# EAGLE board pure_midi (EAGLE 9.4.2)
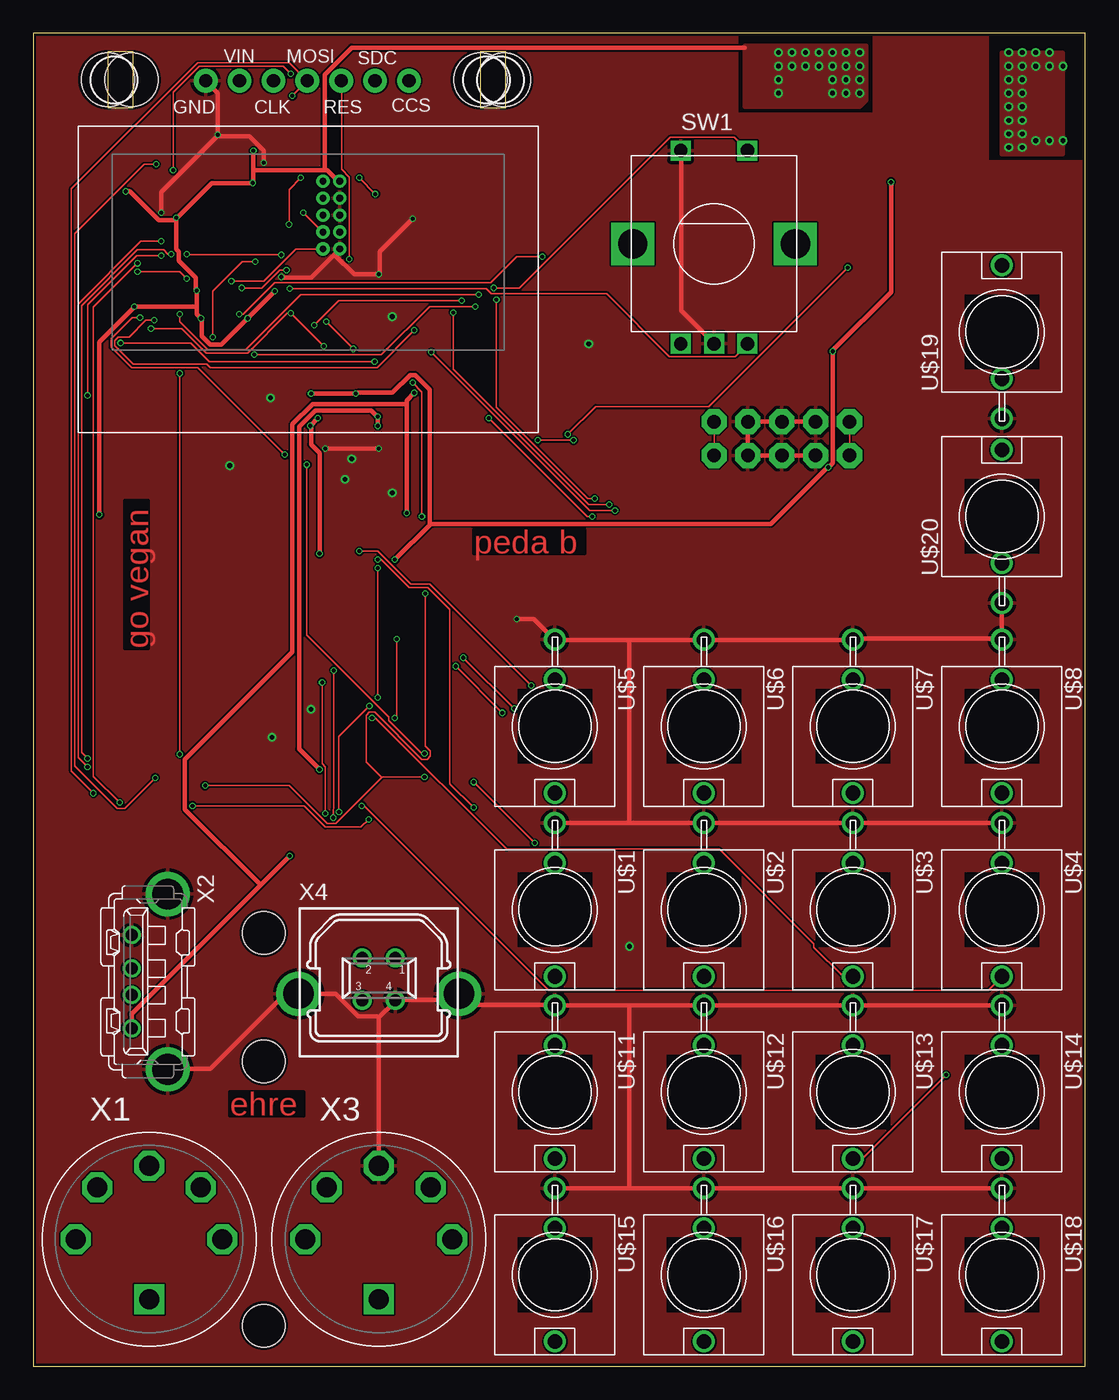
[diagram p0: board, top side]
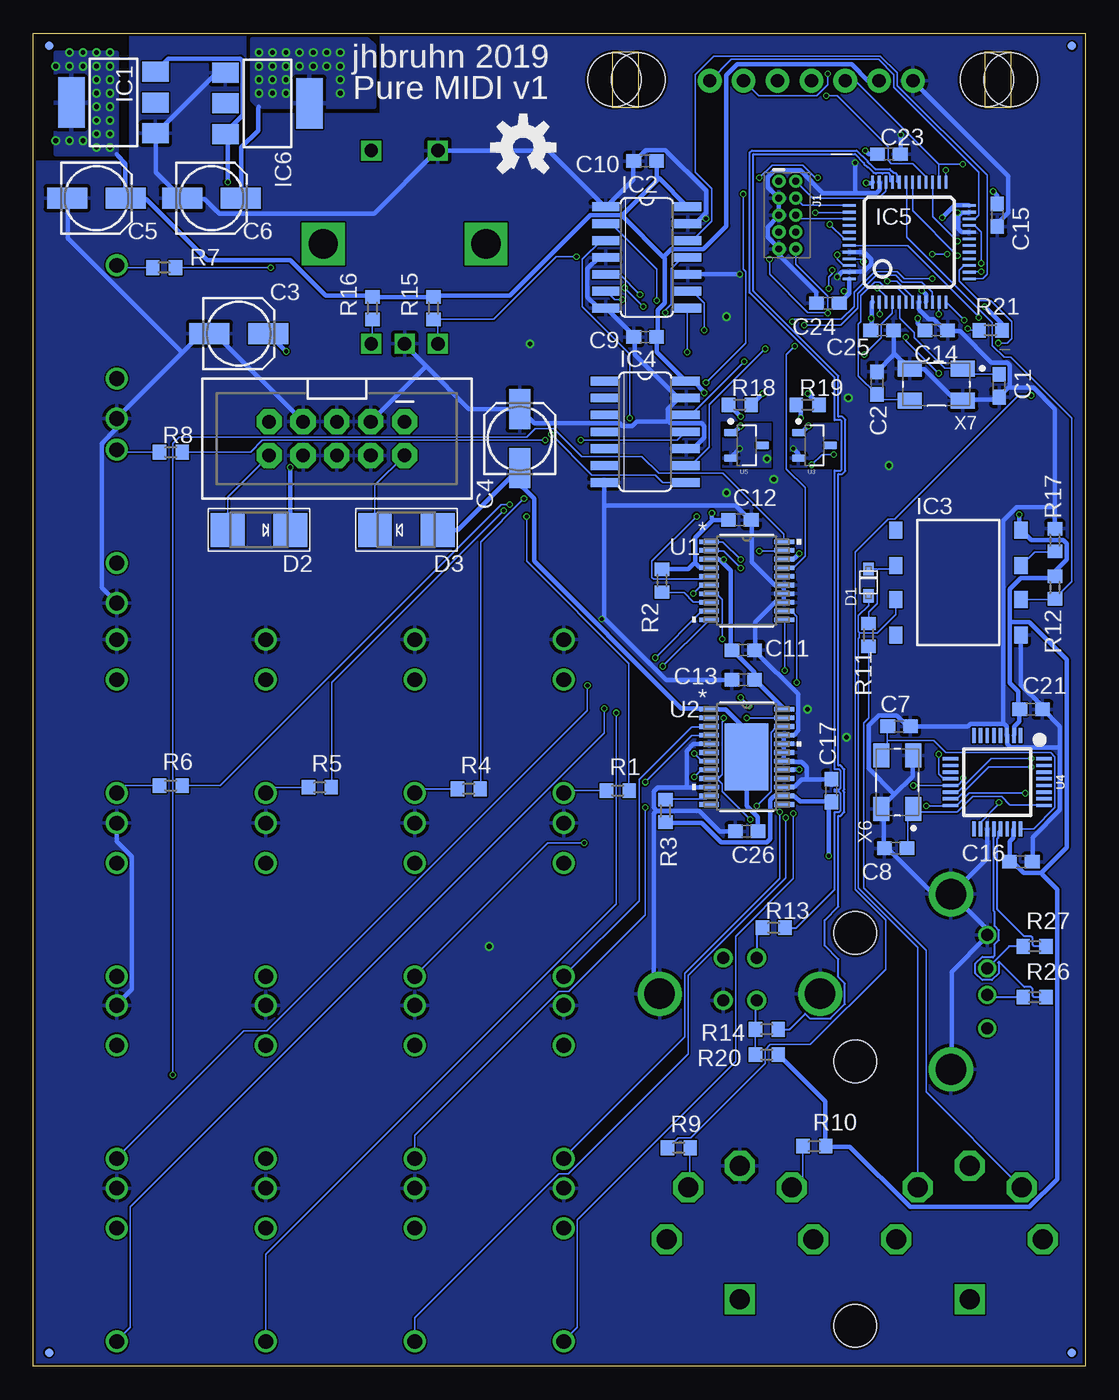
[diagram p1: board, bottom side, seen from below]

Size 78.9 x 100 mm. Coordinates in mm from the lower left corner, seen from the top.
Outline: 0,0 78.9,0 78.9,100 0,100 0,0
Copper layers (1*16): Top 0.035559375mm / dielectric 1.6mm / Bottom 0.035559375mm
Design rules "jlcpcb2layer": minimum track width 5mil, minimum drill 12mil, track to track 5mil, track to pad 5mil, pad to pad 5mil, via to via 5mil, smd to smd 5mil, copper to edge 8mil, drill to drill 6mil, minimum pad ring 5mil, minimum via ring 3mil, stop-mask expansion 2.5mil, vias tented up to drill 0mil, thermal gap 10mil
Net classes: 1 POWER: width 0.356 mm
Holes 3.2 mm at 17.27,22.86 17.27,3.05 17.27,32.51

## Footprints (pad centres in the part's own frame; a part is rotated, then mirrored left to right if it is on the bottom)
C0603 = smd 1.1 x 1: 1 -0.85,0; 2 0.85,0
153CLV-0505 = smd 3 x 1.6: + 2.2,0; - -2.2,0
SOD-323F = smd 1 x 0.8: A -1,0; C 1,0
SMADIODE = smd 2.54 x 2.54: A 2.349,0; C -2.349,0
C1_ADAFRUIT_1.3_128X64_OLED = drill 1 pad 1.778: CCS 25.12,32.43; CLK 14.96,32.43; GND 9.88,32.43; MOSI 17.5,32.43; RES 20.04,32.43; SDC 22.58,32.43; VIN 12.42,32.43 | hole 4: 2.54,32.512; 4.318,32.512; 30.48,32.512; 32.258,32.512
FIDUCIAL-MICRO = smd 0.635 x 0.635: 1 0,0
SOT223 = smd 1.5 x 2: 1 -2.3,-3.15; 2 0,-3.15; 3 2.3,-3.15 | smd 3.8 x 2: 4 0,3.15
SO14 = smd 0.66 x 2.032: 1 -3.81,-3.073; 2 -2.54,-3.073; 3 -1.27,-3.073; 4 0,-3.073; 5 1.27,-3.073; 6 2.54,-3.073; 7 3.81,-3.073; 8 3.81,3.073; 9 2.54,3.073; 10 1.27,3.073; 11 0,3.073; 12 -1.27,3.073; 13 -2.54,3.073; 14 -3.81,3.073
SO8-GW300 = smd 1 x 1.27: 1 -4.69,3.937; 2 -4.69,1.27; 3 -4.69,-1.27; 4 -4.69,-3.937; 5 4.69,-3.937; 6 4.69,-1.27; 7 4.69,1.27; 8 4.69,3.937
TQFP48 = smd 0.2 x 1: 1 -2.75,-4.5; 2 -2.25,-4.5; 3 -1.75,-4.5; 4 -1.25,-4.5; 5 -0.75,-4.5; 6 -0.25,-4.5; 7 0.25,-4.5; 8 0.75,-4.5; 9 1.25,-4.5; 10 1.75,-4.5; 11 2.25,-4.5; 12 2.75,-4.5; 25 2.75,4.5; 26 2.25,4.5; 27 1.75,4.5; 28 1.25,4.5; 29 0.75,4.5; 30 0.25,4.5; 31 -0.25,4.5; 32 -0.75,4.5; 33 -1.25,4.5; 34 -1.75,4.5; 35 -2.25,4.5; 36 -2.75,4.5 | smd 1 x 0.2: 13 4.5,-2.75; 14 4.5,-2.25; 15 4.5,-1.75; 16 4.5,-1.25; 17 4.5,-0.75; 18 4.5,-0.25; 19 4.5,0.25; 20 4.5,0.75; 21 4.5,1.25; 22 4.5,1.75; 23 4.5,2.25; 24 4.5,2.75; 37 -4.5,2.75; 38 -4.5,2.25; 39 -4.5,1.75; 40 -4.5,1.25; 41 -4.5,0.75; 42 -4.5,0.25; 43 -4.5,-0.25; 44 -4.5,-0.75; 45 -4.5,-1.25; 46 -4.5,-1.75; 47 -4.5,-2.25; 48 -4.5,-2.75
2X5-PTH-1.27MM = drill 0.508 pad 1: 1 -2.54,-0.635; 2 -2.54,0.635; 3 -1.27,-0.635; 4 -1.27,0.635; 5 0,-0.635; 6 0,0.635; 7 1.27,-0.635; 8 1.27,0.635; 9 2.54,-0.635; 10 2.54,0.635
2X5-SHROUDED = drill 1.016 pad 1.88 octagon: 1 -1.27,5.08; 2 1.27,5.08; 3 -1.27,2.54; 4 1.27,2.54; 5 -1.27,0; 6 1.27,0; 7 -1.27,-2.54; 8 1.27,-2.54; 9 -1.27,-5.08; 10 1.27,-5.08
R0603 = smd 1 x 1.1: 1 -0.85,0; 2 0.85,0
ALPS_EC12E_SW = drill 1 square: A -2.5,-7.5; B 2.5,-7.5; C 0,-7.5; D -2.5,7; E 2.5,7 | drill 2.2 square: GND1 -6.1,0; GND2 6.1,0
RU_20 = smd 1.473 x 0.356: 1 -2.819,2.925; 2 -2.819,2.275; 3 -2.819,1.625; 4 -2.819,0.975; 5 -2.819,0.325; 6 -2.819,-0.325; 7 -2.819,-0.975; 8 -2.819,-1.625; 9 -2.819,-2.275; 10 -2.819,-2.925; 11 2.819,-2.925; 12 2.819,-2.275; 13 2.819,-1.625; 14 2.819,-0.975; 15 2.819,-0.325; 16 2.819,0.325; 17 2.819,0.975; 18 2.819,1.625; 19 2.819,2.275; 20 2.819,2.925
RE_24 = smd 1.473 x 0.356: 1 -2.819,3.575; 2 -2.819,2.925; 3 -2.819,2.275; 4 -2.819,1.625; 5 -2.819,0.975; 6 -2.819,0.325; 7 -2.819,-0.325; 8 -2.819,-0.975; 9 -2.819,-1.625; 10 -2.819,-2.275; 11 -2.819,-2.925; 12 -2.819,-3.575; 13 2.819,-3.575; 14 2.819,-2.925; 15 2.819,-2.275; 16 2.819,-1.625; 17 2.819,-0.975; 18 2.819,-0.325; 19 2.819,0.325; 20 2.819,0.975; 21 2.819,1.625; 22 2.819,2.275; 23 2.819,2.925; 24 2.819,3.575 | smd 3.251 x 5.029: 25 0,0
TEXAS_INSTRUMENTS_LM4040C5IDBZR_1 = smd 1 x 0.6: 1 -1.2,0.95; 2 -1.2,-0.95; 3 1.2,0
TQFP32-5MM = smd 1.143 x 0.254: 1 -3.5,1.75; 2 -3.5,1.25; 3 -3.5,0.75; 4 -3.5,0.25; 5 -3.5,-0.25; 6 -3.5,-0.75; 7 -3.5,-1.25; 8 -3.5,-1.75; 17 3.5,-1.75; 18 3.5,-1.25; 19 3.5,-0.75; 20 3.5,-0.25; 21 3.5,0.25; 22 3.5,0.75; 23 3.5,1.25; 24 3.5,1.75 | smd 0.254 x 1.143: 9 -1.75,-3.5; 10 -1.25,-3.5; 11 -0.75,-3.5; 12 -0.25,-3.5; 13 0.25,-3.5; 14 0.75,-3.5; 15 1.25,-3.5; 16 1.75,-3.5; 25 1.75,3.5; 26 1.25,3.5; 27 0.75,3.5; 28 0.25,3.5; 29 -0.25,3.5; 30 -0.75,3.5; 31 -1.25,3.5; 32 -1.75,3.5
TEXAS_INSTRUMENTS_LM4040C25IDBZR_1 = smd 1 x 0.6: 1 -1.2,0.95; 2 -1.2,-0.95; 3 1.2,0
WQP-PJ301M-12_JACK = drill 1.1: P$1 0,5; P$2 0,-3.5; P$3 0,-6.5
OG-MIDI_SD-50BV = drill 1.5 octagon: 1 -5.5,0; 2 0,5.5; 3 5.5,0; 4 -3.89,3.89; 5 3.89,3.89 | drill 1.5 square: P$3 0,-4.5
KUSBVX = drill 0.9 pad 1.3: 1 3.5,0; 2 1,0; 3 -1,0; 4 -3.5,0 | drill 2.3 pad 2.8: M1 -6.57,2.71; M2 6.57,2.71
KUSBVX-BS1N = drill 0.9 pad 1.422: 1 1.25,2.7; 2 -1.25,2.7; 3 -1.25,-0.5; 4 1.25,-0.5 | drill 2.3 pad 2.7: M1 -6.02,0; M2 6.02,0
ABRACON_ABM3B-12.000MHZ-B2-T_0 = smd 1.8 x 1.2: 1 -2,-1.2; 2 2,-1.2; 3 2,1.2; 4 -2,1.2
ABRACON_ABM3B-8.000MHZ-B2-T_0 = smd 1.8 x 1.2: 1 -2,-1.2; 2 2,-1.2; 3 2,1.2; 4 -2,1.2

## Placement (x,y rotation side)
C1  22p  [C0603]  6.46,73.56 90 bottom
C2  22p  [C0603]  15.63,73.76 270 bottom
C3  22u  [153CLV-0505]  63.5,77.47 0 bottom
C4  22u  [153CLV-0505]  42.42,69.6 90 bottom
C5  22u  [153CLV-0505]  74.17,87.63 0 bottom
C6  22u  [153CLV-0505]  65.53,87.63 0 bottom
C7  22p  [C0603]  13.97,48.01 180 bottom
C8  22p  [C0603]  14.22,38.86 0 bottom
C9  100n  [C0603]  33.02,77.22 180 bottom
C10  100n  [C0603]  33.02,90.42 180 bottom
C11  100n  [C0603]  25.65,53.72 0 bottom
C12  100n  [C0603]  25.91,63.5 0 bottom
C13  100n  [C0603]  25.65,51.5 180 bottom
C14  100n  [C0603]  11.18,77.72 0 bottom
C15  100n  [C0603]  6.6,86.36 270 bottom
C16  100n  [C0603]  4.83,37.85 0 bottom
C17  100n  [C0603]  19.05,43.18 90 bottom
C21  100n  [C0603]  4.06,49.28 0 bottom
C23  100n  [C0603]  14.73,90.93 0 bottom
C24  100n  [C0603]  19.3,79.76 180 bottom
C25  100n  [C0603]  15.24,77.72 0 bottom
C26  100n  [C0603]  25.4,40.13 0 bottom
D1  1N4148  [SOD-323F]  16.26,58.8 90 bottom
D2  1N4001  [SMADIODE]  61.98,62.74 180 bottom
D3  1N4001  [SMADIODE]  50.93,62.74 0 bottom
DI1  OLED_1.3_128X64_SPI  [C1_ADAFRUIT_1.3_128X64_OLED]  3.05,64.01 0 top
FD1  FIDUCIALUFIDUCIAL  [FIDUCIAL-MICRO]  1.02,1.02 0 bottom
FD2  FIDUCIALUFIDUCIAL  [FIDUCIAL-MICRO]  77.72,1.02 0 bottom
FD3  FIDUCIALUFIDUCIAL  [FIDUCIAL-MICRO]  1.02,99.06 0 bottom
FD4  FIDUCIALUFIDUCIAL  [FIDUCIAL-MICRO]  77.72,99.06 0 bottom
IC1  LD117AS50TR  [SOT223]  72.9,94.81 90 bottom
IC2  74HCT125D  [SO14]  32.89,83.19 270 bottom
IC3  6N138SMD  [SO8-GW300]  9.53,58.8 0 bottom
IC4  74HCT125D  [SO14]  33.02,70.1 270 bottom
IC5  STM32F10XCXT6  [TQFP48]  13.21,84.33 0 bottom
IC6  LD117AS33TR  [SOT223]  61.34,94.74 270 bottom
J1  CORTEX_DEBUG_PTH  [2X5-PTH-1.27MM]  22.35,86.36 270 bottom
LOGO1  OSHW-LOGOM  [OSHW-LOGO-M]  42.16,91.44 0 bottom
PWR1  HEADER2X5SHD  [2X5-SHROUDED]  56.13,69.6 270 bottom
R1  1k  [R0603]  35.05,43.18 0 bottom
R2  4k7  [R0603]  31.75,58.93 90 bottom
R3  4k7  [R0603]  31.5,41.66 270 bottom
R4  1k  [R0603]  46.23,43.31 0 bottom
R5  1k  [R0603]  57.4,43.43 0 bottom
R6  1k  [R0603]  68.58,43.56 0 bottom
R7  1k  [R0603]  69.09,82.42 0 bottom
R8  1k  [R0603]  68.58,68.58 0 bottom
R9  51R  [R0603]  30.48,16.38 0 bottom
R10  51R  [R0603]  20.32,16.51 0 bottom
R11  220R  [R0603]  16.26,54.86 90 bottom
R12  470R  [R0603]  2.29,58.42 90 bottom
R13  22R  [R0603]  23.37,32.89 0 bottom
R14  22R  [R0603]  23.88,25.27 0 bottom
R15  10k  [R0603]  48.9,79.38 90 bottom
R16  10k  [R0603]  53.47,79.38 90 bottom
R17  1k  [R0603]  2.29,61.98 270 bottom
R18  2k  [R0603]  25.91,72.14 0 bottom
R19  2k  [R0603]  20.83,72.14 0 bottom
R20  1k5  [R0603]  23.88,23.37 180 bottom
R21  10k  [R0603]  7.11,77.72 0 bottom
R26  33R  [R0603]  3.81,27.69 0 bottom
R27  33R  [R0603]  3.81,31.5 0 bottom
SW1  EC12E_SW  [ALPS_EC12E_SW]  51.05,84.2 0 top
U1  AD5676ARUZ  [RU_20]  25.4,58.93 0 bottom
U2  AD5754BREZ  [RE_24]  25.4,45.72 0 bottom
U3  TEXAS_INSTRUMENTS_LM4040C5IDBZR1  [TEXAS_INSTRUMENTS_LM4040C5IDBZR_1]  20.32,69.09 0 bottom
U4  MAX3421  [TQFP32-5MM]  6.6,43.81 270 bottom
U5  TEXAS_INSTRUMENTS_LM4040C25IDBZRTEXAS_INSTRUMENTS_LM4040C25IDBZR_0_1  [TEXAS_INSTRUMENTS_LM4040C25IDBZR_1]  25.4,69.09 0 bottom
U$1  WQP-PJ301M-12_JACK  [WQP-PJ301M-12_JACK]  39.12,34.24 180 top
U$2  WQP-PJ301M-12_JACK  [WQP-PJ301M-12_JACK]  50.29,34.24 180 top
U$3  WQP-PJ301M-12_JACK  [WQP-PJ301M-12_JACK]  61.47,34.24 180 top
U$4  WQP-PJ301M-12_JACK  [WQP-PJ301M-12_JACK]  72.64,34.24 180 top
U$5  WQP-PJ301M-12_JACK  [WQP-PJ301M-12_JACK]  39.12,48.01 180 top
U$6  WQP-PJ301M-12_JACK  [WQP-PJ301M-12_JACK]  50.29,48.01 180 top
U$7  WQP-PJ301M-12_JACK  [WQP-PJ301M-12_JACK]  61.47,48.01 180 top
U$8  WQP-PJ301M-12_JACK  [WQP-PJ301M-12_JACK]  72.64,48.01 180 top
U$11  WQP-PJ301M-12_JACK  [WQP-PJ301M-12_JACK]  39.12,20.57 180 top
U$12  WQP-PJ301M-12_JACK  [WQP-PJ301M-12_JACK]  50.29,20.57 180 top
U$13  WQP-PJ301M-12_JACK  [WQP-PJ301M-12_JACK]  61.47,20.57 180 top
U$14  WQP-PJ301M-12_JACK  [WQP-PJ301M-12_JACK]  72.64,20.57 180 top
U$15  WQP-PJ301M-12_JACK  [WQP-PJ301M-12_JACK]  39.12,6.86 180 top
U$16  WQP-PJ301M-12_JACK  [WQP-PJ301M-12_JACK]  50.29,6.86 180 top
U$17  WQP-PJ301M-12_JACK  [WQP-PJ301M-12_JACK]  61.47,6.86 180 top
U$18  WQP-PJ301M-12_JACK  [WQP-PJ301M-12_JACK]  72.64,6.86 180 top
U$19  WQP-PJ301M-12_JACK  [WQP-PJ301M-12_JACK]  72.64,77.6 0 top
U$20  WQP-PJ301M-12_JACK  [WQP-PJ301M-12_JACK]  72.64,63.75 0 top
X1  OG-MIDI_MAB5SHCUI-SD-50BV  [OG-MIDI_SD-50BV]  8.68,9.53 0 top
X2  KUSBVX  [KUSBVX]  7.37,28.84 270 top
X3  OG-MIDI_MAB5SHCUI-SD-50BV  [OG-MIDI_SD-50BV]  25.91,9.53 0 top
X4  KUSBVX-BS1N  [KUSBVX-BS1N]  25.91,27.94 0 top
X6  ABRACON_ABM3B-12.000MHZ-B2-TABRACON_ABM3B-12.000MHZ-B2-T_0_0  [ABRACON_ABM3B-12.000MHZ-B2-T_0]  14.1,43.81 90 bottom
X7  ABRACON_ABM3B-8.000MHZ-B2-TABRACON_ABM3B-8.000MHZ-B2-T_0_0  [ABRACON_ABM3B-8.000MHZ-B2-T_0]  11.18,73.66 180 bottom

## Library data of the parts
C1 C2 C7-C17 C21 C23-C26 = rcl; SPICEPREFIX: C
C3-C6 D2 D3 PWR1 = GMSN
D1 = adafruit
DI1 = microbuilder
FD1-FD4 LOGO1 = SparkFun-Aesthetics
IC1 IC6 = v-reg
IC2 IC4 = 74xx-eu
IC3 = 6n138
IC5 = stm32
J1 = SparkFun-Connectors
R1-R14 R17-R21 R26 R27 = rcl; SPICEPREFIX: R
R15 R16 = resistor
SW1 = switch-alps; MPN: EC12E2424407; OC_FARNELL: 1520813; OC_NEWARK: 74M1068
U1 = AD5676ARUZ
U2 = ad5754; MANUFACTURER_PART_NUMBER: AD5754BREZ; VENDOR: Vendor
U3 = lm4040
U4 = SparkFun-IC-Comms; PROD_ID: IC-09517
U5 = lm4040; CIIVA_IDS: 1469524; CODE__JEDEC: TO-236; COMPONENT_LINK_1_DESCRIPTION: Manufacturer URL; COMPONENT_LINK_1_URL: http://www.ti.com/; COMPONENT_LINK_3_DESCRIPTION: Package Specification; COMPONENT_LINK_3_URL: http://www.ti.com/litv/pdf/mpds108a; DATASHEET: http://www.ti.com/general/docs/lit/getliterature.tsp?genericPartNumber=LM4040C25&fileType=pdf; DATASHEET_VERSION: SLOS456K; FOOTPRINT_VARIANT_NAME_0: Level C; FOOTPRINT_VARIANT_NAME_1: Level B; FOOTPRINT_VARIANT_NAME_2: Level A; IMPORTED: yes; IMPORTED_FROM: vault; IMPORT_TS: 1521848919; INITIAL_ACCURACY__25DEG_C: 0.5; IOUT_IZ_MAXM_A: 15; MF: Texas Instruments; MIN_IZ_FOR_REGULATIONUA: 75; MOUNTING_TECHNOLOGY: Surface Mount; MPN: LM4040C25IDBZR; PACKAGE: DBZ0003A; PACKAGE_DESCRIPTION: 3-Pin Plastic Small Outline, Body 2.92 x 1.3 mm, Pitch 0.95 mm; PACKAGE_VERSION: 4203227/B; PREFIX: U; RATING: Catalog; RELEASE_DATE: 1464596443; ROHS: Yes; SUB_FAMILY: Shunt Voltage Reference; TEMP_COEFFMAXPPM_DEGREE_C: 100; TEMP_COEFFTYPPPM_DEGREE_C: 15; VAULT_GUID: 5413DB6E-9D10-4027-A969-08E6820F4111; VAULT_REVISION: C65482E3-4B49-4B9C-954A-31B6BAF04754; VO_V: 2.5
U$1-U$8 U$11-U$20 = thonkiconn
X1 X3 = yarns_v03
X2 X4 = con-kycon
X6 = Abracon - ABM3B-12.000MHZ-B2-T; CASE_PACKAGE: TO-263-4; CIIVA_IDS: 780008; COMPONENT_LINK_1_DESCRIPTION: Manufacturer URL; COMPONENT_LINK_1_URL: http://www.abracon.com/; DATASHEET: http://www.abracon.com/Resonators/abm3b.pdf; DATASHEET_VERSION: Aug-15; DROPOUT_VOLTAGE: 2 V; FOOTPRINT_VARIANT_NAME_0: Manufacturer Recommended; IMPORTED: yes; IMPORTED_FROM: vault; IMPORT_TS: 1521842082; MAX_INPUT_VOLTAGE: 25 V; MAX_OPERATING_TEMPERATURE: 125 degC; MAX_OUPUT_CURRENT: 1.5 A; MF: Abracon; MIN_INPUT_VOLTAGE: 7 V; MIN_OPERATING_TEMPERATURE: 0 degC; MOUNT: Surface Mount; MPN: ABM3B-12.000MHZ-B2-T; NOMINAL_OUTPUT_VOLTAGE: 5 V; OUTPUTS: 1; OUTPUT_CURRENT: 1.5 A; OUTPUT_VOLTAGE: 5 V; PACKAGE: ABM3B; PACKAGE_DESCRIPTION: 4-Pin Surface Mount Device, Body 5 x 3.2 mm; PACKAGE_QUANTITY: 500; PACKAGING: Tape and Reel; PINS: 3; PREFIX: X; RADIATION_HARDENING: No; REACH_SVHC: No SVHC; RELEASE_DATE: 1475124701; RO_HSCOMPLIANT: true; VAULT_GUID: 24D0D680-39A5-4850-90ED-8111495D22A7; VAULT_REVISION: F364169E-CEC8-420F-9568-55648A1B8707; WEIGHT: 0.050897 oz
X7 = Abracon - ABM3B-8.000MHZ-B2-T; CIIVA_IDS: 780007; COMPONENT_LINK_1_DESCRIPTION: Manufacturer URL; COMPONENT_LINK_1_URL: http://www.abracon.com/; DATASHEET: http://www.abracon.com/Resonators/abm3b.pdf; DATASHEET_VERSION: Aug-15; FOOTPRINT_VARIANT_NAME_0: Manufacturer Recommended; HEIGHT: 1.05 mm; IMPORTED: yes; IMPORTED_FROM: vault; IMPORT_TS: 1521848452; LENGTH: 9.8 mm; MAX_OPERATING_TEMPERATURE: 85 degC; MAX_SUPPLY_VOLTAGE: 45 V; MF: Abracon; MIN_OPERATING_TEMPERATURE: -40 degC; MIN_SUPPLY_VOLTAGE: 8.2 V; MOUNT: Surface Mount; MPN: ABM3B-8.000MHZ-B2-T; OUTPUTS: 4; OUTPUT_CURRENT: 1.8 A; OUTPUT_VOLTAGE: 3.3 V; PACKAGE: ABM3B; PACKAGE_DESCRIPTION: 4-Pin Surface Mount Device, Body 5 x 3.2 mm; PACKAGE_QUANTITY: 50; PACKAGING: Rail/Tube; PINS: 28; PREFIX: X; RADIATION_HARDENING: No; REACH_SVHC: No SVHC; RELEASE_DATE: 1475110298; RO_HSCOMPLIANT: true; SWITCHING_FREQUENCY: 30 KHz; VAULT_GUID: DF36FD76-DBF6-4F5B-9133-3A23BF37761E; VAULT_REVISION: 21BE7540-0093-4E3A-B40E-EAA9C33749C3; WEIGHT: 0.004233 oz; WIDTH: 4.5 mm

## Nets
+3V3 [POWER]: C6.+ C14.1 C15.1 C16.1 C21.1 C23.1 C24.1 C25.1 IC3.8 IC5.1 IC5.9 IC5.24 IC5.36 IC5.48 IC6.4 J1.1 R10.2 R12.2 R20.1 R21.2 U4.2 U4.23
+5V [POWER]: C5.+ C9.1 C10.1 C12.1 C17.1 DI1.VIN IC1.4 IC2.14 IC4.14 R2.2 R3.2 R15.2 R16.2 U1.4 U2.14 X2.1
+12V [POWER]: C3.+ C11.1 C13.1 D2.C IC1.3 IC6.3 R18.2 R19.2 U1.3 U2.24
-12V [POWER]: C4.- C26.2 D3.A U2.1 U2.25
AREF_5 [POWER]: R19.1 U1.18 U3.1
AREF_25 [POWER]: R18.1 U2.17 U5.1
CV_OUT_1: U2.3 U$1.P$1
CV_OUT_2: U2.4 U$2.P$1
CV_OUT_3: U2.23 U$3.P$1
CV_OUT_4: U2.22 U$4.P$1
CV_OUT_5: U1.2 U$11.P$1
CV_OUT_6: U1.1 U$12.P$1
CV_OUT_7: U1.20 U$13.P$1
CV_OUT_8: U1.19 U$14.P$1
CV_OUT_9: U1.12 U$15.P$1
CV_OUT_10: U1.11 U$16.P$1
CV_OUT_11: U1.10 U$17.P$1
CV_OUT_12: U1.9 U$18.P$1
D_GATE_OUT_1: IC2.2 IC5.10
D_GATE_OUT_2: IC2.5 IC5.11
D_GATE_OUT_3: IC2.9 IC5.12
D_GATE_OUT_4: IC2.12 IC5.13
D_GATE_OUT_5: IC4.9 IC5.14
D_GATE_OUT_6: IC4.12 IC5.15
ENC_A: IC5.2 R15.1 SW1.A
ENC_B: IC5.3 R16.1 SW1.B
ENC_SW: IC5.4 SW1.E
GATE_OUT_1: R1.1 U$5.P$1
GATE_OUT_2: R4.1 U$6.P$1
GATE_OUT_3: R5.1 U$7.P$1
GATE_OUT_4: R6.1 U$8.P$1
GATE_OUT_5: R7.1 U$19.P$1
GATE_OUT_6: R8.1 U$20.P$1
GND [POWER]: C1.1 C2.1 C3.- C4.+ C5.- C6.- C7.1 C8.1 C9.2 C10.2 C11.2 C12.2 C13.2 C14.2 C15.2 C16.2 C17.2 C21.2 C23.2 C24.2 C25.2 C26.1 DI1.GND IC1.1 IC2.1 IC2.4 IC2.7 IC2.10 IC2.13 IC3.5 IC4.7 IC4.10 IC4.13 IC5.8 IC5.20 IC5.23 IC5.35 IC5.44 IC5.47 IC6.1 J1.3 J1.5 J1.9 PWR1.3 PWR1.4 PWR1.5 PWR1.6 PWR1.7 PWR1.8 R17.1 SW1.C SW1.D U1.13 U1.14 U1.15 U2.5 U2.10 U2.15 U2.18 U2.19 U2.20 U2.21 U3.2 U4.3 U4.19 U5.2 U$1.P$3 U$2.P$3 U$3.P$3 U$4.P$3 U$5.P$3 U$6.P$3 U$7.P$3 U$8.P$3 U$11.P$3 U$12.P$3 U$13.P$3 U$14.P$3 U$15.P$3 U$16.P$3 U$17.P$3 U$18.P$3 U$19.P$3 U$20.P$3 X2.4 X2.M1 X2.M2 X3.2 X4.4 X4.M1 X4.M2 X6.2 X6.4 X7.2 X7.4
INT_USB: IC5.21 U4.18
JTCK: IC5.37 J1.4
JTDI: IC5.38 J1.8
JTDO: IC5.39 J1.6
JTMS: IC5.34 J1.2
MIDI_DATA_IN: IC3.6 IC5.31 R12.1
MIDI_DATA_OUT: IC5.30 R9.1
MISO: IC5.27 U4.15
MOSI: DI1.MOSI IC5.28 U1.7 U2.9 U4.16
N$1: R2.1 U1.8
N$2: R3.1 U2.11
N$3: C2.2 IC5.6 X7.3
N$4: D1.C IC3.2 R11.2
N$5: R11.1 X1.4
N$6: C1.2 IC5.5 X7.1
N$7: C8.2 U4.25 X6.1
N$8: C7.2 U4.24 X6.3
N$9: D1.A IC3.3 X1.5
N$10: IC2.3 R1.2
N$11: IC2.6 R4.2
N$12: IC3.7 R17.2
N$13: D2.A PWR1.9 PWR1.10
N$14: IC2.8 R5.2
N$15: IC2.11 R6.2
N$17: IC4.8 R7.2
N$18: IC4.11 R8.2
N$19: R9.2 X3.5
N$20: D3.C PWR1.1 PWR1.2
N$21: R13.1 X4.2
N$22: R10.1 X3.4
N$23: R14.1 R20.2 X4.3
RST: DI1.RES IC5.7 J1.10 R21.1 U1.17
RST_USB: IC5.45 U4.12
SCK: DI1.CLK IC5.26 U1.6 U2.8 U4.13
SDC_OLED: DI1.SDC IC5.25
SS_DAC0: IC5.42 U1.5
SS_DAC1: IC5.43 U2.7
SS_OLED: DI1.CCS IC5.22
SS_USB: IC5.46 U4.14
USB_D_N: R26.1 X2.2
USB_D_P: R27.1 X2.3
USB_N: R26.2 U4.20
USB_P: R27.2 U4.21
USB_PER_D_N: IC5.32 R13.2
USB_PER_D_P: IC5.33 R14.2

## Tracks (layer width: path | path; a pad name or v marks a point on that pad's centre or on a via)
+3V3  (via drill 0.3, 0.35 pad 0.65)
  Top 0.356: 12.26,79.5 12.26,78.93 v12.57,78.61 12.64,78.49 12.64,77.28 13.27,76.64 14.1,76.64 v16.07,78.61 v18.1,80.64 | 12.26,79.5 v12.26,80.71 12.19,80.83 12.19,81.66 10.92,82.93 10.92,83.63 10.73,83.82 v10.73,86.17 | v10.73,86.17 10.86,86.23 13.4,88.77 v16.45,88.77 16.51,88.9 16.51,89.72 | 12.26,79.5 v7.56,79.5 7.49,79.38 4.95,76.83 v4.95,63.88 | v6.92,88.14 7.24,88.14 9.4,85.98 10.6,85.98 v10.73,86.17 | 16.51,89.72 v16.51,91.19 | J1.1 22.86,88.9 22.04,89.72 21.84,89.72 | 16.51,89.72 21.84,89.72 | 53.34,98.93 23.88,98.93 21.84,96.9 21.84,89.72
  Bottom 0.356: R20.1 22.99,23.37 19.49,19.88 19.49,16.51 R10.2 19.3,16.45 17.65,16.45 13.14,11.94 4.19,11.94 2.1,14.03 2.1,35.75 3.24,36.89 3.3,37.02 | U4.23 5.4,40.26 5.4,39.62 5.65,39.37 5.65,37.85 C16.1 5.52,37.78 5.4,37.78 4.64,37.02 3.3,37.02 | U4.2 5.33,47.37 5.33,48.01 4.95,48.39 4.95,49.28 C21.1 5.02,49.4 5.02,50.61 5.65,51.24 5.65,55.82 | 5.65,55.82 5.65,58.29 4.83,59.12 2.35,59.12 R12.2 2.29,59.63 1.4,60.52 1.4,61.72 1.65,61.98 4.06,61.98 IC3.8 4.95,62.87 v4.95,63.88 | 3.3,37.02 1.4,38.92 1.4,53.02 4.19,55.82 5.65,55.82 | C6.+ 63.31,87.63 63.31,91.44 62.04,92.71 62.04,94.36 61.98,94.49 | 17.72,80.64 17.72,80.45 18.41,79.76 C24.1 | 17.72,80.64 17.72,81.53 IC5.48 | 16,78.61 16,77.79 16.07,77.72 C25.1 | 16,78.61 16,79.82 IC5.1 | v12.26,80.71 11.94,80.39 11.94,79.88 IC5.9 | v12.57,78.61 12.57,78.23 12.06,77.72 C14.1 | v10.73,86.17 9.78,87.12 8.76,87.12 IC5.24 | v16.45,88.77 16,88.77 IC5.36 | v7.56,79.5 6.29,78.23 6.29,77.72 R21.2 | C15.1 6.6,87.82 v6.92,88.14 | C23.1 16.26,90.93 v16.51,91.19 | v16.07,78.61 16,78.61 | v18.1,80.64 17.72,80.64
  other vias: 55.88,98.55 56.9,98.55 57.91,98.55 58.93,98.55 59.94,98.55 60.96,98.55 61.98,98.55 61.98,97.54 61.98,96.52 60.96,97.54 60.96,96.52 60.96,95.5 61.98,95.5 59.94,95.5 59.94,96.52 59.94,97.54 58.93,97.54 57.91,97.54 56.9,97.54 55.88,97.54 55.88,96.52 55.88,95.5
  pour Bottom: 53.34,99.06 53.34,94.49 61.98,94.49 62.48,95 62.48,99.57 53.85,99.57
  pour Top: 53.34,99.06 53.34,94.49 56.9,94.49 61.98,94.49 62.48,95 62.48,99.06
+5V  (via drill 0.3, 0.35 pad 0.65)
  Top 0.356: X2.1 7.37,26.42 17.05,36.1 | v19.24,38.29 17.05,36.1 | 28,72.2 28,72.45 v28.57,73.03 | 28,72.2 v28,64.01 | 17.05,36.1 11.37,41.78 11.37,45.53 19.43,53.59 19.43,70.67 20.95,72.2 28,72.2
  Bottom 0.356: R3.2 31.5,40.77 28.77,40.77 27.3,39.31 23.88,39.31 23.62,39.56 23.62,42.48 23.37,42.74 22.73,42.74 U2.14 22.54,42.74 21.78,42.74 21.4,42.35 19.05,42.35 C17.1 19.24,42.23 v19.24,38.29 | 27.94,63.5 C12.1 | 27.94,63.5 29.27,62.17 29.27,60.26 | 29.27,60.26 28.96,59.94 28.26,59.94 U1.4 | R2.2 31.75,59.82 29.78,59.82 29.4,60.2 29.27,60.26 | 72.64,90.93 72.58,90.81 72.01,90.23 72.01,87.63 C5.+ 71.82,87.57 70.42,87.57 65.85,83 59.63,83 56.96,80.33 53.59,80.33 R16.2 53.47,80.2 48.9,80.2 R15.2 48.77,80.33 43.18,80.33 37.15,86.36 34.73,86.36 | 31.97,89.12 29.84,87 IC2.14 | 31.97,89.12 32.13,89.28 32.13,90.42 C10.1 | 31.97,89.12 34.73,86.36 | 31.66,83.22 34.67,86.23 34.73,86.36 | 31.66,83.22 31.56,83.12 31.56,79.76 32.07,79.25 32.07,77.34 C9.1 32.13,77.22 32.13,76.07 29.97,73.91 IC4.14 29.78,73.85 29.34,73.85 28.57,73.09 v28.57,73.03 | 31.66,83.22 31.05,83.82 28.64,83.82 26.92,85.53 26.92,96.84 26.1,97.66 17.53,97.66 16.32,96.46 15.49,96.46 DI1.VIN | v28,64.01 28,63.63 27.94,63.5
  other vias: 77.22,91.95 76.2,91.95 75.18,91.95 74.17,91.44 73.15,91.44 73.15,92.46 73.15,93.47 74.17,93.47 74.17,92.46 74.17,94.49 73.15,94.49 73.15,95.5 74.17,95.5 74.17,96.52 73.15,96.52 73.15,97.54 73.15,98.55 74.17,98.55 74.17,97.54 75.18,98.55 75.18,97.54 76.2,97.54 77.22,97.54 76.2,98.55
  pour Bottom: 72.64,98.55 72.64,90.93 77.22,90.93 77.22,98.55
  pour Top: 72.64,98.55 72.64,90.93 77.22,90.93 77.22,98.55
+12V  (via drill 0.3)
  Top 0.356: v20.83,72.96 v24.19,72.96 24.32,73.03 26.92,73.03 28.26,74.36 28.64,74.36 29.72,73.28 29.72,63.18 | 29.72,63.18 29.72,63.12 v27.11,60.52 | v64.33,88.84 64.33,80.58 60.01,76.26 v59.94,76.14 59.94,67.75 v59.63,67.44 59.5,67.37 55.31,63.18 29.72,63.18
  Bottom 0.356: v20.83,72.96 20,72.14 R19.2 | v24.19,72.96 25.02,72.14 R18.2 | U2.24 22.61,49.34 24.7,51.44 C13.1 24.83,51.5 24.83,52.07 26.48,53.72 C11.1 26.61,53.85 26.61,59.69 27.27,60.36 | 27.27,60.36 27.43,60.52 28.19,60.52 U1.3 | v27.11,60.52 27.27,60.36 | IC1.3 69.72,97.16 68.77,98.11 63.37,98.11 63.18,97.92 63.18,93.85 64.45,92.58 64.45,92.46 IC6.3 64.33,92.33 v64.33,88.84 | v59.63,67.44 D2.C | v59.94,76.14 61.28,77.47 C3.+
-12V
  Bottom 0.356: C26.2 24.57,40.13 24.57,41.21 25.4,42.04 U2.25 25.46,45.85 25.46,47.75 26.99,49.28 28.19,49.28 U2.1 28.38,49.34 30.29,49.34 41.34,60.39 41.34,65.09 42.93,66.67 C4.- 42.42,67.37 47.05,62.74 D3.A
AREF_5  (via drill 0.3)
  Top 0.356: v21.34,71.12 v20.77,70.55 20.83,70.42 20.83,69.15 21.46,68.52 v21.46,60.96
  Bottom 0.356: v20.77,70.55 21.27,70.04 21.46,70.04 U3.1 | v21.34,71.12 21.34,71.82 21.65,72.14 R19.1 | v21.46,60.96 21.84,60.58 22.54,60.58 U1.18
AREF_25  (via drill 0.3)
  Top 0.356: v25.84,70.55 v25.84,71.25 25.72,71.31 25.34,71.69 21.14,71.69 19.94,70.48 19.94,46.29 v21.46,44.77
  Bottom 0.356: v25.84,70.55 26.35,70.04 26.54,70.04 U5.1 | v25.84,71.25 26.73,72.14 R18.1 | v21.46,44.77 22.54,44.77 U2.17
CV_OUT_1
  Bottom 0.127: U2.3 28.26,47.94 29.53,47.94 33.47,44.01 33.47,34.92 39.12,29.27 U$1.P$1
CV_OUT_2  (via drill 0.3)
  Top 0.127: v37.59,39.24 v33.02,43.81
  Bottom 0.127: v33.02,43.81 29.53,47.31 28.26,47.31 U2.4 | v37.59,39.24 40.32,39.24 50.29,29.27 U$2.P$1
CV_OUT_3  (via drill 0.3)
  Top 0.127: v25.4,48.64 25.65,48.64 35.5,38.8 51.44,38.8 58.55,31.69 58.55,31.43 60.71,29.27 61.47,29.27 U$3.P$1
  Bottom 0.127: v25.4,48.64 22.61,48.64 U2.23
CV_OUT_4  (via drill 0.3)
  Top 0.127: v24.64,42.04 24.83,42.04 38.67,28.19 71.63,28.19 72.64,29.21 U$4.P$1
  Bottom 0.127: v24.64,42.04 23.56,43.12 23.56,47.56 23.18,47.94 22.61,47.94 U2.22
CV_OUT_5  (via drill 0.3)
  Top 0.127: v25.84,50.16 v25.84,59.88 | v25.21,49.53 22.92,47.24 v22.92,41.59
  Bottom 0.127: v25.84,59.88 27.11,61.15 28.19,61.15 U1.2 | v25.21,49.53 v25.84,50.16 | v22.92,41.59 22.92,36.58 30.04,29.46 30.04,24.7 39.12,15.62 U$11.P$1
CV_OUT_6  (via drill 0.3)
  Top 0.127: v25.84,60.52 26.1,60.52 28.19,58.42 29.59,58.42 31.24,56.77 31.24,43.69 v33.02,41.91
  Bottom 0.127: v25.84,60.52 27.18,61.85 28.19,61.85 U1.1 | v33.02,41.91 33.02,33.85 38.73,28.13 39.5,28.13 50.29,17.34 U$12.P$1
CV_OUT_7  (via drill 0.3)
  Top 0.127: v68.45,21.84 62.23,15.62 61.47,15.62 U$13.P$1
  Bottom 0.127: v68.45,21.84 68.45,69.22 67.94,69.72 41.91,69.72 41.27,70.36 39.88,70.36 37.78,68.26 33.27,68.26 32,66.99 27.18,66.99 22.61,62.42 22.61,61.91 U1.20
CV_OUT_8  (via drill 0.3)
  Top 0.127: v24.45,61.15 25.84,61.15 28.32,58.67 29.72,58.67 v37.34,51.05
  Bottom 0.127: v24.45,61.15 22.61,61.15 U1.19 | v37.34,51.05 37.34,49.21 61.4,25.15 63.12,25.15 72.64,15.62 U$14.P$1
CV_OUT_9  (via drill 0.3)
  Top 0.127: v21.65,51.31 21.65,45.21 21.91,44.96 v21.91,41.47
  Bottom 0.127: v21.65,51.31 21.65,56.26 22.04,56.64 22.54,56.64 U1.12 | v21.91,41.47 21.91,36.58 26.23,32.26 26.23,22.86 38.1,10.99 38.1,2.92 39.12,1.91 U$15.P$1
CV_OUT_10  (via drill 0.3)
  Top 0.127: v22.54,52.2 22.54,41.85 22.48,41.78 v22.48,41.15
  Bottom 0.127: v22.54,52.2 22.54,55.94 U1.11 | v22.48,41.15 22.48,36.64 29.78,29.34 29.78,23.43 38.8,14.41 39.5,14.41 50.29,3.62 U$16.P$1
CV_OUT_11  (via drill 0.3)
  Top 0.127: v35.18,49.02 v31.69,52.51
  Bottom 0.127: v31.69,52.51 28.26,55.94 U1.10 | v35.18,49.02 35.18,34.67 61.47,8.38 U$17.P$1
CV_OUT_12  (via drill 0.3)
  Top 0.127: v36.07,49.34 v32.26,53.15
  Bottom 0.127: v32.26,53.15 28.77,56.64 28.26,56.64 U1.9 | v36.07,49.34 36.07,47.5 71.63,11.94 71.63,2.92 72.64,1.91 U$18.P$1
D_GATE_OUT_1  (via drill 0.3)
  Top 0.127: v21.08,78.11 22.92,79.95 v32.13,79.95
  Bottom 0.127: v21.08,78.11 18.35,78.11 17.08,79.38 17.08,80.45 15.68,81.85 14.22,81.85 13.72,81.34 12.26,81.34 11.49,80.58 11.49,79.88 IC5.10 | v32.13,79.95 32.13,82.3 35.56,85.72 IC2.2
D_GATE_OUT_2  (via drill 0.3)
  Top 0.127: v10.99,78.93 10.99,78.36 13.08,76.26 15.94,76.26 20.07,80.39 v33.4,80.39
  Bottom 0.127: v10.99,78.93 10.99,79.82 IC5.11 | v33.4,80.39 34.92,81.92 IC2.5
D_GATE_OUT_3  (via drill 0.3)
  Top 0.127: v9.08,78.49 8.45,78.49 7.18,77.22 6.35,77.22 6.1,76.96 6.1,76.58 7.49,75.18 13.02,75.18 13.27,74.93 25.78,74.93 v28.57,77.72
  Bottom 0.127: v9.08,78.49 10.41,79.82 IC5.12 | v28.57,77.72 28.57,79.76 29.46,80.64 IC2.9
D_GATE_OUT_4
  Bottom 0.127: IC2.12 29.46,84.45 28,85.92 28,88.33 29.27,89.6 29.27,96.9 27.88,98.3 15.37,98.3 14.1,97.03 14.1,96.08 7.37,89.34 7.37,81.92 7.68,81.6 8.7,81.6 IC5.13
D_GATE_OUT_5  (via drill 0.3)
  Top 0.127: v7.81,82.11 10.99,82.11 v11.49,81.6 | v24,76.33 v21.97,78.36
  Bottom 0.127: v7.81,82.11 8.7,82.11 IC5.14 | v11.49,81.6 13.59,81.6 14.1,82.11 15.81,82.11 17.34,80.58 17.34,79.5 18.29,78.55 21.78,78.55 v21.97,78.36 | v24,76.33 28.19,72.14 28.19,68.96 29.59,67.56 IC4.9
D_GATE_OUT_6  (via drill 0.3)
  Top 0.127: v6.54,76.77 11.81,76.77 13.21,75.37 v25.59,75.37
  Bottom 0.127: v6.54,76.77 5.84,76.77 5.52,77.09 5.52,78.36 7.11,79.95 8,79.95 9.46,81.41 9.46,82.23 9.14,82.55 8.76,82.55 IC5.15 | v25.59,75.37 29.59,71.37 IC4.12
ENC_A  (via drill 0.3)
  Top 0.127: v15.43,78.93 15.75,78.93 18.1,81.28 34.29,81.28 36.26,83.25 v38.16,83.25
  Bottom 0.127: v15.43,78.93 15.43,79.82 IC5.2 | v38.16,83.25 39.69,83.25 44.39,78.55 48.58,78.55 | 48.58,78.55 48.9,78.55 R15.1 48.58,78.55 | 48.58,78.55 48.58,76.71 SW1.A
ENC_B  (via drill 0.3)
  Top 0.127: v15.62,80.9 17.14,80.9 18.48,82.23 v18.99,82.23 | v19.24,80.83 33.97,80.83 34.35,80.45 42.99,80.45 47.69,75.75 52.64,75.75 53.53,76.64 SW1.B
  Bottom 0.127: v15.62,80.9 14.99,80.26 14.99,79.88 IC5.3 | v18.99,82.23 18.99,81.98 19.24,81.72 v19.24,80.83 | R16.1 53.47,76.77 53.53,76.71 SW1.B
ENC_SW  (via drill 0.3)
  Top 0.127: v16.57,75.88 26.1,75.88 29.72,79.5 v33.15,79.5 | v34.54,80.9 36.45,80.9 47.75,92.2 52.58,92.2 53.53,91.25 SW1.E
  Bottom 0.127: v16.57,75.88 15.3,77.15 15.3,78.17 14.48,78.99 14.48,79.82 IC5.4 | v34.54,80.9 v33.15,79.5
GATE_OUT_1
  Bottom 0.127: R1.1 38.99,43.18 39.12,43.05 U$5.P$1
GATE_OUT_2
  Bottom 0.127: R4.1 50.04,43.31 50.29,43.05 U$6.P$1
GATE_OUT_3
  Bottom 0.127: R5.1 61.09,43.43 61.47,43.05 U$7.P$1
GATE_OUT_4
  Bottom 0.127: R6.1 72.14,43.56 72.64,43.05 U$8.P$1
GATE_OUT_5
  Bottom 0.127: R7.1 72.52,82.42 72.64,82.55 U$19.P$1
GATE_OUT_6
  Bottom 0.127: R8.1 72.52,68.58 72.64,68.71 U$20.P$1
GND  (via drill 0.3, 0.35 pad 0.65)
  Top 0.356: v13.84,92.39 13.84,95.5 12.95,96.39 DI1.GND | v9.59,86.55 9.59,88.08 13.78,92.27 v13.84,92.39 | v18.61,81.72 18.73,81.72 18.8,81.66 20.83,81.66 22.57,83.41 | J1.9 22.57,83.41 | 22.57,83.41 24.07,81.92 v25.91,81.92 25.97,82.04 25.97,83.63 v28.45,86.11 | v17.27,90.3 17.27,91.19 16.19,92.27 13.97,92.27 v13.84,92.39 | PWR1.8 PWR1.6 PWR1.4 PWR1.3 PWR1.5 PWR1.7 | 44.7,40.77 50.29,40.77 U$2.P$3 50.42,40.77 61.47,40.77 U$3.P$3 61.59,40.77 72.64,40.77 U$4.P$3 | 44.7,40.77 39.12,40.77 U$1.P$3 | U$20.P$3 U$8.P$3 72.52,54.61 61.59,54.61 U$7.P$3 61.47,54.48 50.42,54.48 U$6.P$3 50.29,54.48 44.7,54.48 | 44.7,54.48 39.12,54.48 U$5.P$3 38.99,54.61 37.53,56.07 v36.26,56.07 | 44.7,54.48 44.7,40.77 | SW1.D 48.58,91.19 48.58,79.18 SW1.C | 44.7,13.34 50.29,13.34 U$16.P$3 50.42,13.34 61.47,13.34 U$17.P$3 61.59,13.34 72.64,13.34 U$18.P$3 | 44.7,13.34 39.12,13.34 U$15.P$3 | 44.7,27.05 39.24,27.05 U$11.P$3 39.12,27.11 32.83,27.11 32.07,27.88 X4.M2 31.88,27.94 31.43,27.5 27.18,27.5 X4.4 27.05,27.3 25.91,26.16 | 44.7,27.05 50.29,27.05 U$12.P$3 50.42,27.05 61.47,27.05 U$13.P$3 61.59,27.05 72.64,27.05 U$14.P$3 | 25.91,26.16 X3.2 | 25.91,26.16 25.78,26.23 24.38,26.23 22.67,27.94 X4.M1 19.75,27.88 18.86,27.88 13.27,22.29 10.1,22.29 X2.M2 | 44.7,27.05 44.7,13.34 | v25.91,68.83 v21.91,68.83
  Bottom 0.356: 9.43,86.39 9.27,86.55 8.76,86.55 IC5.23 | 9.43,86.39 9.53,86.3 9.53,85.34 9.27,85.09 8.76,85.09 IC5.20 | C15.2 6.6,85.72 5.78,86.55 5.78,89.28 12.89,96.39 DI1.GND | v13.84,92.39 13.84,90.93 C23.2 | v9.59,86.55 9.43,86.39 | 17.27,88.01 19.68,88.01 21.4,89.72 23.3,89.72 23.81,89.22 23.81,88.46 J1.3 J1.5 23.05,86.23 23.81,85.47 23.81,84.71 23.05,83.95 J1.9 22.99,83.38 20.19,80.58 20.19,79.76 C24.2 | 17.27,88.01 15.68,88.01 15.43,88.27 15.43,88.77 IC5.35 | IC5.44 17.65,83.57 16.57,83.57 16.07,83.06 16.07,82.68 16.64,82.11 17.65,82.11 IC5.47 17.84,82.11 18.22,82.11 v18.61,81.72 | v25.91,81.92 IC2.10 | 17.27,88.01 v17.27,90.3 | IC6.1 64.52,97.03 65.15,97.03 69.6,92.58 IC1.1 69.72,92.46 69.72,89.6 67.75,87.63 C6.- 67.56,87.57 66.04,87.57 64.96,86.49 53.34,86.49 48.7,91.12 SW1.D 48.51,91.19 40.26,91.19 36.13,87.06 IC2.1 35.94,87 33.91,89.03 33.91,90.42 C10.2 33.72,90.49 32.96,91.25 31.5,91.25 28.45,88.2 28.45,86.55 28.67,86.33 | IC2.13 29.27,85.72 28.67,86.33 | 28.67,86.33 v28.45,86.11 | 67.72,76.04 72.64,71.12 U$19.P$3 72.71,70.93 72.71,70.29 73.79,69.22 73.79,58.42 72.64,57.28 U$20.P$3 | 67.72,76.04 66.29,77.47 C3.- 65.53,77.41 65.22,77.41 PWR1.7 | 67.72,76.04 76.33,84.64 76.33,87.63 C5.- | IC4.10 29.4,68.83 28.57,69.66 28.57,70.55 28.77,70.74 31.11,70.74 31.3,70.93 | 31.3,70.93 31.3,71.82 30.48,72.64 IC4.13 30.61,72.71 33.78,75.88 33.78,77.09 C9.2 33.91,77.22 33.91,77.34 35.94,79.38 IC2.7 36.13,79.44 36.58,79.44 37.34,80.2 37.34,82.36 36.51,83.19 IC2.4 | 49.44,75.03 51.05,76.64 SW1.C | 49.44,75.03 46.23,71.82 42.42,71.82 C4.+ 42.29,71.69 41.34,70.74 34.92,70.74 34.73,70.55 33.97,70.55 33.66,70.87 31.43,70.87 31.3,70.93
  Bottom 0.356: 49.44,75.03 PWR1.3 | C13.2 31.43,51.5 36.07,56.13 | 36.07,64.58 36.07,66.29 IC4.7 | 36.07,64.58 36.07,56.13 | 20.89,44.01 21.27,44.01 21.78,43.5 22.54,43.5 U2.15 | 20.89,44.01 19.05,44.01 C17.2 | 20.89,44.01 20.89,44.96 21.27,45.34 22.42,45.34 U2.18 22.61,45.4 22.61,46.04 U2.19 22.61,46.16 22.61,46.67 U2.20 22.61,46.86 22.61,47.31 U2.21 22.42,47.37 21.84,47.37 21.53,47.69 21.53,50.42 24.7,53.59 C11.2 24.77,53.72 24.77,55.82 23.3,57.28 22.61,57.28 U1.13 22.61,57.47 22.61,57.91 U1.14 22.61,58.1 22.61,58.48 U1.15 22.61,58.61 23.3,58.61 25.02,60.33 25.02,63.5 C12.2 25.21,63.56 26.23,64.58 36.07,64.58 | v36.26,56.07 36.2,56.07 36.07,56.13 | 14.35,76.01 14.35,77.72 C25.2 | 14.35,76.01 13.21,74.87 X7.2 13.02,74.8 12.06,74.8 9.78,72.52 9.34,72.52 X7.4 9.14,72.52 6.73,72.52 6.6,72.64 C1.1 6.41,72.77 5.78,73.41 5.65,73.41 | C2.1 14.35,75.88 14.35,76.01 | IC5.8 12.51,79.82 12.51,79.31 11.75,78.55 11.37,78.55 10.54,77.72 C14.2 10.16,77.66 9.4,77.66 7.05,75.31 5.84,75.31 5.65,75.12 5.65,73.41 | 2.29,64.45 2.29,71.82 3.87,73.41 5.65,73.41 | 2.29,64.45 R17.1 | 6.16,48.2 6.1,48.2 5.91,48.01 5.91,47.37 U4.3 5.84,47.18 5.84,46.67 5.59,46.42 1.91,46.42 | 6.16,48.2 8.64,48.2 8.83,48.01 C7.1 13.27,48.07 13.4,48.07 14.16,48.83 15.49,48.83 16.26,48.07 16.26,44.83 14.32,42.89 | 1.91,46.42 1.91,48.01 3.17,49.28 C21.2 3.3,49.4 3.3,49.59 4.83,51.12 IC3.5 | 1.91,46.42 1.91,41.72 3.94,39.69 3.94,37.85 C16.2 | 14.32,42.89 15.24,41.97 X6.4 15.24,41.78 15.11,41.66 15.11,38.86 C8.1 14.92,38.8 14.8,38.8 11.49,35.5 10.22,35.5 X2.M1 | 14.32,42.89 12.95,44.26 12.95,45.78 X6.2
  Bottom 0.356: U4.19 7.37,40.26 7.37,38.1 10.03,35.43 X2.M1 | X2.M1 9.91,35.31 7.37,32.77 X2.4 7.43,32.19 10.03,29.59 10.03,22.29 X2.M2 | 2.29,64.45 5.14,64.45 6.16,63.44 6.16,48.2 | C26.1 27.43,40.13 28.96,41.66 32.13,41.66 | 32.13,41.66 32.38,41.91 32.38,43.12 32.07,43.43 29.91,43.43 | 29.91,43.43 28.26,43.43 U2.10 | 29.91,43.43 29.91,46.16 29.4,46.67 28.26,46.67 U2.5 | 32.13,41.66 32.26,41.59 32.38,41.47 32.38,28.38 X4.M2 | U$4.P$3 72.64,39.37 71.5,38.23 71.5,28.26 72.64,27.11 U$14.P$3 | v21.91,68.83 21.53,68.45 | v25.91,68.83 26.54,68.2 U5.2
  other vias: 23.88,68.07 26.92,65.53 14.73,67.56 17.78,72.64 26.92,78.74 41.66,76.71 44.7,31.5 20.83,49.28 17.91,47.18 23.37,66.55
  pour Top: -5.08,101.09 -5.08,-3.56 -2.54,-6.1 78.74,-6.1 86.36,1.52 86.36,83.31 79.25,90.42 71.63,90.42 71.63,101.09 62.99,101.09 62.99,93.98 52.83,93.98 52.83,101.09
  pour Bottom: -6.1,102.11 -6.1,-7.11 -1.52,-11.68 75.69,-11.68 91.95,4.57 91.95,79.25 79.76,91.44 79.76,90.93 79.25,90.42 71.63,90.42 71.63,101.09 62.99,101.09 62.99,93.98 52.83,93.98 52.83,103.63 -4.57,103.63
INT_USB  (via drill 0.3)
  Top 0.127: v7.81,82.74 4.51,79.44 4.51,44.26 v6.48,42.29
  Bottom 0.127: v7.81,82.74 7.81,85.09 8.26,85.53 8.7,85.53 IC5.21 | v6.48,42.29 6.48,42.16 7.81,40.83 7.81,40.32 U4.18
JTCK
  Bottom 0.127: J1.4 21.21,87.12 17.72,87.12 IC5.37
JTDI  (via drill 0.3)
  Top 0.127: J1.8 v20.26,86.55
  Bottom 0.127: v20.26,86.55 17.72,86.55 IC5.38
JTDO
  Bottom 0.127: J1.6 21.46,86.11 17.72,86.11 IC5.39
JTMS
  Bottom 0.127: J1.2 20.45,87.63 15.49,87.63 14.99,88.14 14.99,88.77 IC5.34
MIDI_DATA_IN
  Bottom 0.127: IC5.31 13.4,88.77 13.4,84.71 6.99,78.3 6.99,76.58 6.1,75.69 5.59,75.69 1.02,71.12 1.02,58.86 2.29,57.59 R12.1 2.29,57.53 IC3.6
MIDI_DATA_OUT  (via drill 0.3)
  Top 0.127: v9.59,83.31 7.75,83.31 4.06,79.63 v4.06,72.83
  Bottom 0.127: v9.59,83.31 12.95,86.68 12.95,88.77 IC5.30 | v4.06,72.83 5.02,72.83 14.29,63.56 14.8,63.56 17.27,61.09 17.27,35.75 14.99,33.47 14.99,29.78 20.64,24.13 23.62,24.13 24,23.75 24,22.73 29.59,17.14 30.54,17.14 31.3,16.38 R9.1
MISO  (via drill 0.3)
  Top 0.127: v9.59,84.39 8.06,84.39 3.37,79.69 3.37,45.66 v4.06,44.96
  Bottom 0.127: v9.59,84.39 11.43,86.23 11.43,88.77 IC5.27 | v4.06,44.96 7.24,44.96 9.59,42.61 10.1,42.61 U4.15
MOSI  (via drill 0.3)
  Top 0.127: v19.43,95.31 20.51,96.39 DI1.MOSI 20.51,96.46 19.18,97.79 12.32,97.79 2.86,88.33 2.86,44.64 v4.51,42.99 | v11.94,42.04 20.32,42.04 21.91,40.45 24.57,40.45 v25.15,41.02 | v27.24,54.55 27.24,48.77 v27.11,48.64
  Bottom 0.127: v19.43,95.31 18.61,95.31 14.8,91.5 14.8,90.49 14.54,90.23 12.95,90.23 12,89.28 12,88.84 IC5.28 | v11.94,42.04 10.16,42.04 U4.16 10.1,42.1 9.59,42.1 8.7,42.99 v4.51,42.99 | v25.15,41.02 27.24,43.12 27.24,43.69 27.62,44.07 28.19,44.07 U2.9 27.56,44.07 27.24,44.39 27.24,48.32 27.11,48.45 v27.11,48.64 | v27.24,54.55 27.24,57.53 27.62,57.91 28.19,57.91 U1.7
N$1
  Bottom 0.127: R2.1 31.75,58.04 30.1,58.04 29.4,57.34 28.26,57.34 U1.8
N$2
  Bottom 0.127: R3.1 31.5,42.55 28.45,42.55 28.26,42.74 U2.11
N$3
  Bottom 0.127: IC5.6 13.46,79.88 13.46,80.26 14.16,80.96 15.05,80.96 15.43,81.34 15.81,81.34 16.83,80.33 16.83,78.36 17.02,78.17 17.02,74.3 15.68,72.96 C2.2 15.62,72.9 15.24,72.52 13.21,72.52 X7.3
N$4
  Bottom 0.127: 15.62,59.82 14.48,59.82 14.22,60.07 IC3.2 | 15.62,59.82 16.26,59.82 D1.C | R11.2 16.26,56.58 15.62,57.21 15.62,59.82
N$5
  Bottom 0.127: R11.1 16.26,48.64 16.64,48.26 16.64,35.88 11.94,31.18 11.94,20.57 4.83,13.46 X1.4
N$6
  Bottom 0.127: IC5.5 13.91,79.82 13.91,78.61 12.83,77.53 12.83,77.15 10.54,74.87 9.21,74.87 X7.1 9.14,74.8 8.76,74.42 6.48,74.42 C1.2
N$7
  Bottom 0.127: C8.2 13.34,38.86 13.34,41.4 12.95,41.78 X6.1 12.89,41.78 12.7,41.59 9.59,41.59 8.45,42.74 6.29,42.74 5.65,42.1 3.11,42.1 U4.25
N$8
  Bottom 0.127: 14.86,46.93 14.86,46.23 15.24,45.85 X6.3 | 14.86,46.93 14.86,48.01 C7.2 | 14.86,46.93 11.37,46.93 10.48,46.04 2.6,46.04 2.29,45.72 2.29,41.91 3.87,40.32 4.83,40.32 U4.24
N$9
  Bottom 0.127: D1.A 16.26,57.09 17.02,56.33 17.02,55.12 16.92,55.02 | 16.92,55.02 16.89,54.99 15.62,54.99 14.22,56.39 14.22,57.53 IC3.3 | 16.92,55.02 16.95,54.99 16.95,54.67 17.02,54.61 17.02,35.88 12.57,31.43 12.57,13.46 X1.5
N$10  (via drill 0.3)
  Top 0.127: v41.91,63.75 41.53,63.75 v34.16,71.12
  Bottom 0.127: v41.91,63.75 41.91,60.39 34.23,52.7 34.23,43.18 R1.2 | v34.16,71.12 34.16,75.95 37.72,79.5 37.72,83.06 36.32,84.45 IC2.3
N$11  (via drill 0.3)
  Top 0.127: v42.1,65.09 41.59,65.09 34.73,71.94 v34.73,80.01
  Bottom 0.127: v42.1,65.09 45.34,61.85 45.34,43.31 R4.2 | v34.73,80.01 35.31,80.01 35.94,80.64 IC2.6
N$12
  Bottom 0.127: R17.2 2.29,61.09 3.81,61.09 IC3.7
N$13
  Top 0.127: PWR1.10 PWR1.9
  Bottom 0.127: D2.A 64.33,65.22 PWR1.10
N$14  (via drill 0.3)
  Top 0.127: v43.62,64.2 41.72,64.2 v29.84,76.07
  Bottom 0.127: v43.62,64.2 56.52,51.31 56.52,43.43 R5.2 | v29.84,76.07 29.84,79.38 IC2.8
N$15  (via drill 0.3)
  Top 0.127: v43.18,64.64 41.66,64.64 31.5,74.8 v31.5,79.06
  Bottom 0.127: R6.2 64.9,43.56 43.81,64.64 v43.18,64.64 | v31.5,79.06 31.5,79.25 31.05,79.69 31.05,82.36 30.23,83.19 IC2.11
N$17  (via drill 0.3)
  Top 0.127: v61.09,82.42 50.67,72.01 42.16,72.01 v40.07,69.91
  Bottom 0.127: v61.09,82.42 R7.2 | v40.07,69.91 37.02,66.86 32.26,66.86 31.69,66.29 IC4.8
N$18  (via drill 0.3)
  Top 0.127: v37.85,69.47 v40.51,69.47
  Bottom 0.127: R8.2 62.61,68.58 61.72,69.47 v40.51,69.47 | v37.85,69.47 30.61,69.47 29.97,70.1 IC4.11
N$19
  Bottom 0.127: R9.2 29.65,16.38 29.65,13.59 29.78,13.46 X3.5
N$20
  Top 0.127: PWR1.2 PWR1.1
  Bottom 0.127: D3.C 53.28,66.1 PWR1.2
N$21
  Bottom 0.152: R13.1 24.66,32.45 X4.2
N$22
  Bottom 0.127: X3.4 21.21,14.22 21.21,16.51 R10.1
N$23
  Bottom 0.127: R20.2 24.77,23.37 24.77,25.21 R14.1
  Bottom 0.152: R14.1 24.73,27.37 X4.3
RST  (via drill 0.3)
  Top 0.127: v14.86,81.41 17.27,81.41 19.68,83.82 J1.10 | v8.83,77.85 11.11,77.85 12.95,76.01 16.07,76.01 19.05,78.99 v19.3,78.99 v21.78,76.52 | v23.69,83.06 23.69,89.22 23.11,89.79 23.11,96.39 DI1.RES
  Bottom 0.127: v14.86,81.41 14.16,81.41 13.02,80.26 13.02,79.88 IC5.7 | R21.1 8.7,77.72 v8.83,77.85 | 19.3,79.06 19.3,80.26 21.72,82.68 J1.10 | v21.78,76.52 22.42,75.88 22.42,67.31 21.02,65.91 21.02,60.77 21.84,59.94 22.54,59.94 U1.17 | v23.69,83.06 23.69,81.92 20.83,79.06 19.3,79.06 | 19.3,79.06 v19.3,78.99
RST_USB  (via drill 0.3)
  Top 0.127: v16.64,82.87 15.68,82.87 13.46,80.64 v13.46,77.22 | v10.99,45.91 v10.99,74.49
  Bottom 0.127: v16.64,82.87 16.83,83.06 17.65,83.06 IC5.45 | v13.46,77.22 13.46,76.96 v10.99,74.49 | v10.99,45.91 10.99,44.45 10.6,44.07 10.16,44.07 U4.12
SCK  (via drill 0.3)
  Top 0.127: v12.89,43.56 19.18,43.56 22.04,40.7 22.67,40.7 26.13,44.16 | 26.13,44.16 26.16,44.2 v29.34,44.2 | v29.4,57.98 29.4,46.55 29.78,46.16 29.78,45.78 29.53,45.53 29.15,45.53 25.59,49.09 25.21,49.09 24.96,48.83 24.96,45.34 26.13,44.16 | v9.21,90.17 8.32,90.17 3.11,84.96 3.11,45.02 6.29,41.85 6.86,41.85 v9.14,44.13
  Bottom 0.127: 10.99,90.17 10.99,88.84 IC5.26 | 10.99,90.17 17.21,96.39 17.97,96.39 DI1.CLK | v12.89,43.56 10.16,43.56 U4.13 10.1,43.62 9.53,43.62 9.14,44.01 v9.14,44.13 | v29.34,44.2 28.83,44.7 28.26,44.7 U2.8 | v29.4,57.98 28.83,58.55 28.26,58.55 U1.6 | v9.21,90.17 10.99,90.17
SDC_OLED  (via drill 0.3)
  Top 0.127: v10.48,89.72 10.48,95.57 12.45,97.54 18.73,97.54 v19.3,96.97
  Bottom 0.127: v10.48,89.72 10.48,88.84 IC5.25 | v19.3,96.97 19.3,96.14 20.13,95.31 24.51,95.31 25.59,96.39 DI1.SDC
SS_DAC0  (via drill 0.3)
  Top 0.127: v19.18,85.66 19.18,88.27 v20.07,89.15 | v25.65,87.95 v24.45,89.15 | v28.45,73.79 29.15,73.09 v29.15,63.75
  Bottom 0.127: v19.18,85.66 18.1,84.58 IC5.42 | v20.07,89.15 20.26,89.15 21.21,90.11 23.5,90.11 v24.45,89.15 | v25.65,87.95 25.65,82.3 25.46,82.11 25.46,76.77 v28.45,73.79 | v29.15,63.75 32.51,60.39 32.51,59.18 32.38,59.05 28.45,59.05 28.26,59.24 U1.5
SS_DAC1  (via drill 0.3)
  Top 0.127: v8,78.68 7.43,78.68 5.84,77.09 5.84,76.45 7.37,74.93 12.32,74.93 v18.86,68.39 | v20.51,67.63 20.51,54.86 26.67,48.7 26.67,48.45 29.15,45.97 v29.34,45.97
  Bottom 0.127: v8,78.68 8,78.74 13.34,84.07 17.65,84.07 IC5.43 | v18.86,68.39 19.75,68.39 v20.51,67.63 | v29.34,45.97 28.77,45.4 28.26,45.4 U2.7
SS_OLED
  Bottom 0.127: IC5.22 8.7,86.11 8.26,86.11 8,86.36 8,89.6 14.35,95.95 14.35,96.9 15.49,98.04 26.54,98.04 28.13,96.46 DI1.CCS
SS_USB  (via drill 0.3)
  Top 0.127: v18.61,83.38 11.56,83.38 v11.49,83.44 | v10.35,83.44 10.1,83.44 9.78,83.76 7.81,83.76 3.62,79.57 3.62,46.04 v4.06,45.59
  Bottom 0.127: v18.61,83.38 18.61,83.06 18.16,82.61 17.72,82.61 IC5.46 | v10.35,83.44 v11.49,83.44 | v4.06,45.59 7.05,45.59 9.53,43.12 10.1,43.12 U4.14
USB_D_N
  Bottom 0.152: R26.1 7.21,27.69 X2.2
USB_D_P
  Bottom 0.152: R27.1 5.71,31.5 X2.3
USB_N
  Bottom 0.127: U4.20 6.79,40.26 6.79,40.2 6.8,40.13
  Bottom 0.152: R26.2 3.81,27.69 3.96,27.83 3.96,28.32 4.08,28.44 4.57,28.44 6.47,30.34 6.55,30.27 6.49,30.21 6.49,29.48 7,28.97 7.73,28.97 8.24,29.48 8.24,30.21 7.73,30.72 7,30.72 6.94,30.66 6.8,30.8 6.8,31.66 6.49,31.98 6.49,32.71 6.8,33.02 6.8,34.09 6.88,34.17 6.88,39.7 6.8,39.77 6.8,40.13
USB_P
  Bottom 0.127: U4.21 6.41,40.26 6.41,40.2 6.48,40.13 6.52,40.13
  Bottom 0.152: R27.2 3.81,31.5 3.96,31.64 3.96,32.13 4.08,32.25 4.57,32.25 6.6,34.28 6.6,39.58 6.52,39.66 6.52,40.13
USB_PER_D_N
  Bottom 0.152: R13.2 21.66,32.89 18.8,35.76 18.8,41.58 18.47,41.58 18.35,41.7 18.35,42.96 18.47,43.08 18.8,43.08 18.8,43.28 18.47,43.28 18.35,43.4 18.35,44.66 18.47,44.78 18.8,44.78 18.8,67.21 18.34,67.21 18.27,67.29 18.27,70.89 18.34,70.96 18.8,70.96 18.8,74.17 25.17,80.54 25.17,91.05 25.01,91.21 17.16,91.21 16.34,90.39 16.34,90.35 16.22,90.23 16.17,90.23 15.76,89.81 14.66,89.81 14.38,89.53 14.27,89.53 14.15,89.41 14.15,88.9 14.08,88.83 IC5.32
USB_PER_D_P
  Bottom 0.152: R14.2 22.17,25.27 21.01,26.43 20.66,26.08 19.12,26.08 18.03,27.17 18.03,28.71 18.52,29.2 18.52,30.53 19.55,31.57 19.55,33.46 18.52,34.49 18.52,41.3 18.35,41.3 18.07,41.58 18.07,43.08 18.17,43.18 18.07,43.28 18.07,44.78 18.35,45.06 18.52,45.06 18.52,66.93 18.23,66.93 17.99,67.17 17.99,71.01 18.23,71.24 18.52,71.24 18.52,74.28 24.89,80.66 24.89,90.93 17.27,90.93 16.61,90.28 16.61,90.23 16.33,89.95 16.29,89.95 15.87,89.53 15.77,89.53 15.71,89.47 15.64,89.53 15.27,89.53 15.21,89.47 15.14,89.53 14.77,89.53 14.65,89.41 14.65,88.9 14.48,88.9 14.48,88.85 IC5.33

## Text on the board
Top: peda b | go vegan | ehre
bNames: jhbruhn 2019 | Pure MIDI v1